# Altium PCB Gateway.PcbDoc
Units mil, origin at the board's own origin, x right, y up, seen from the top; angles counter-clockwise.
Board outline 3450 x 3705 mil, 2 copper layers (Top Layer, Bottom Layer); 7 components, 18 nets, 70 pads, 0 vias.
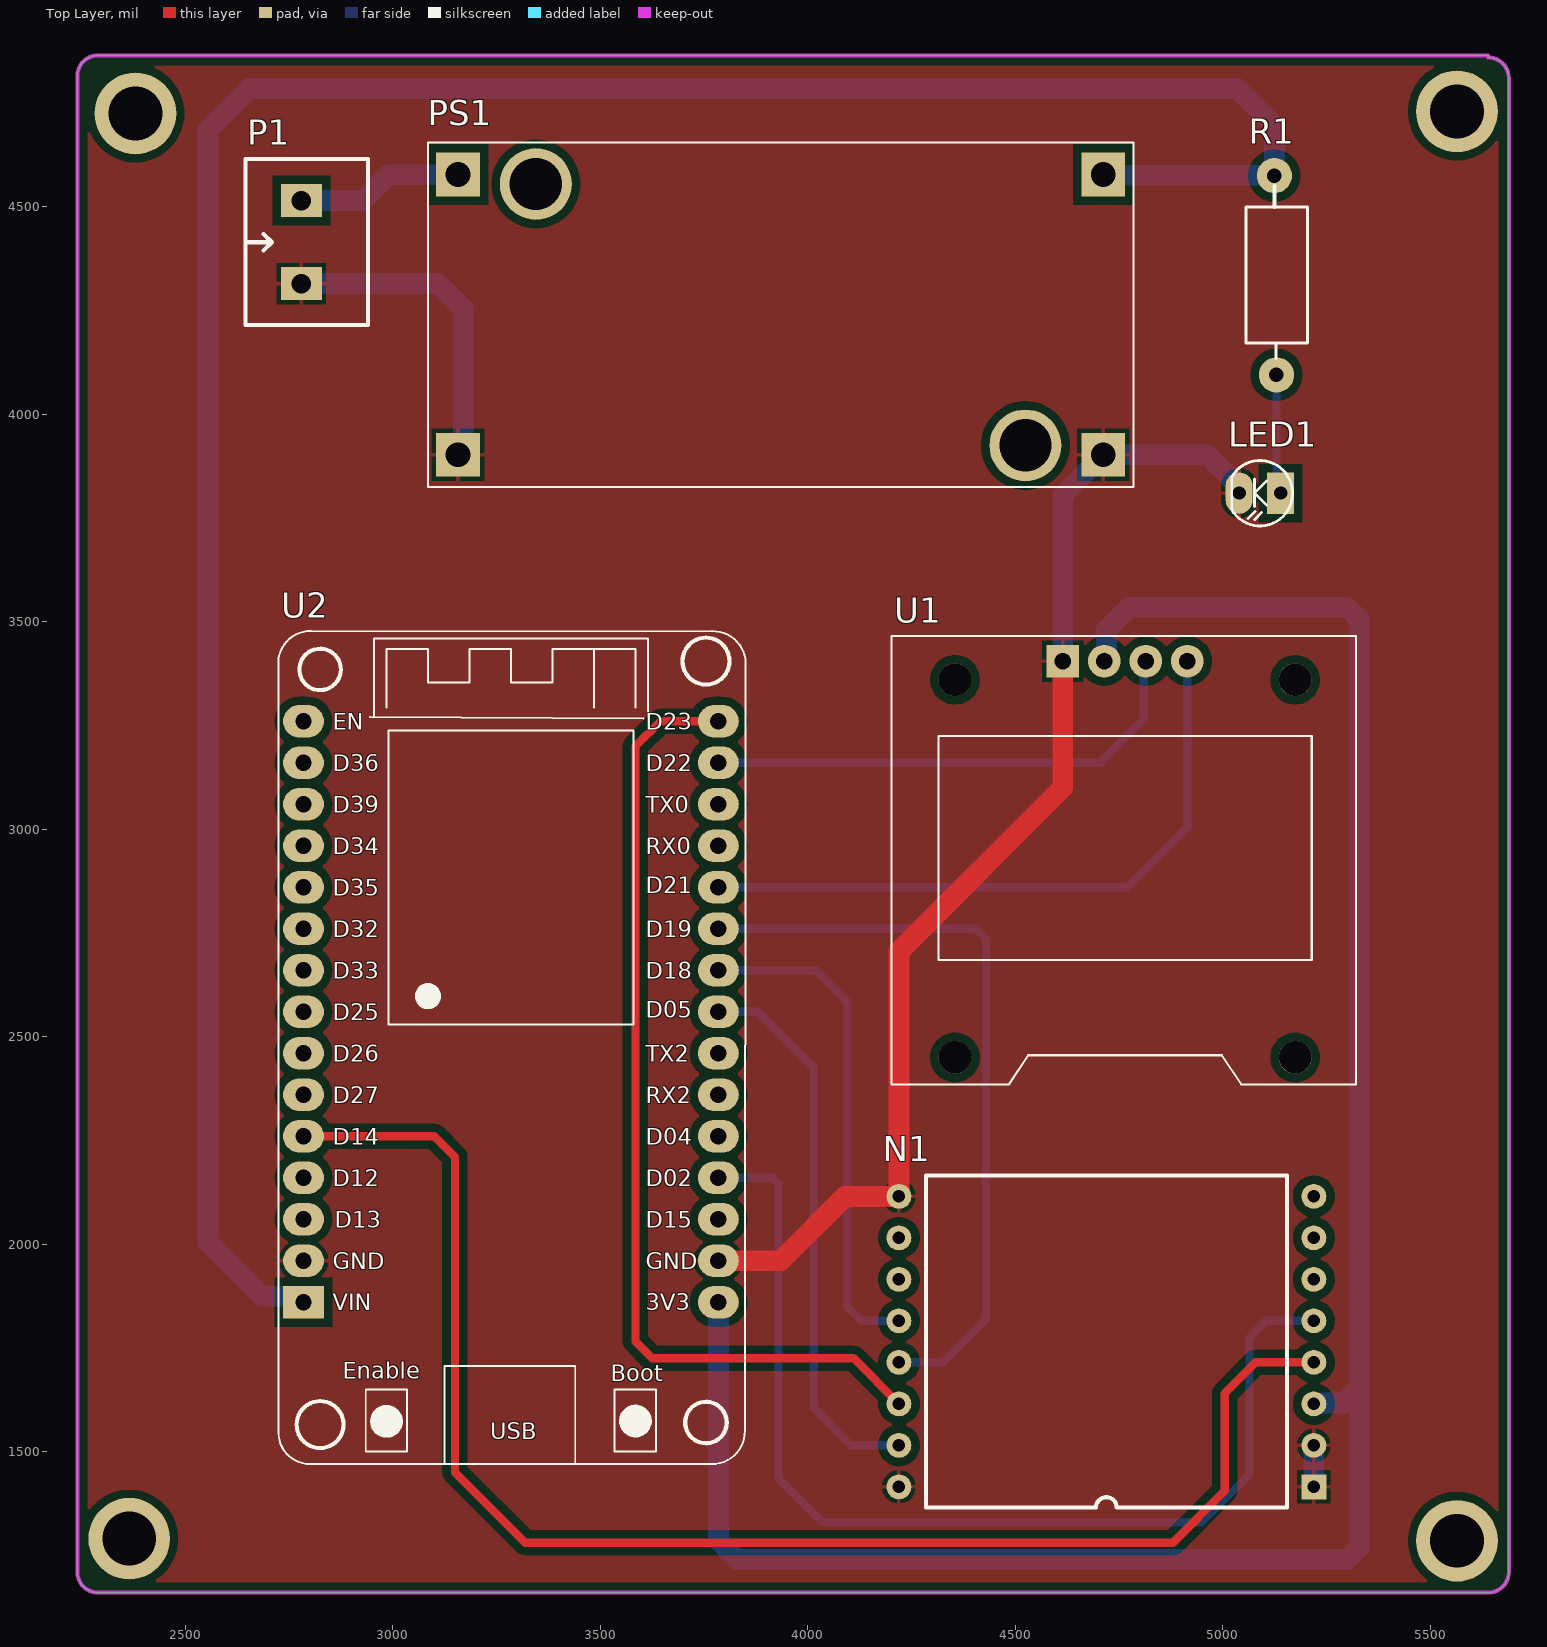
[diagram p0: Top Layer view]
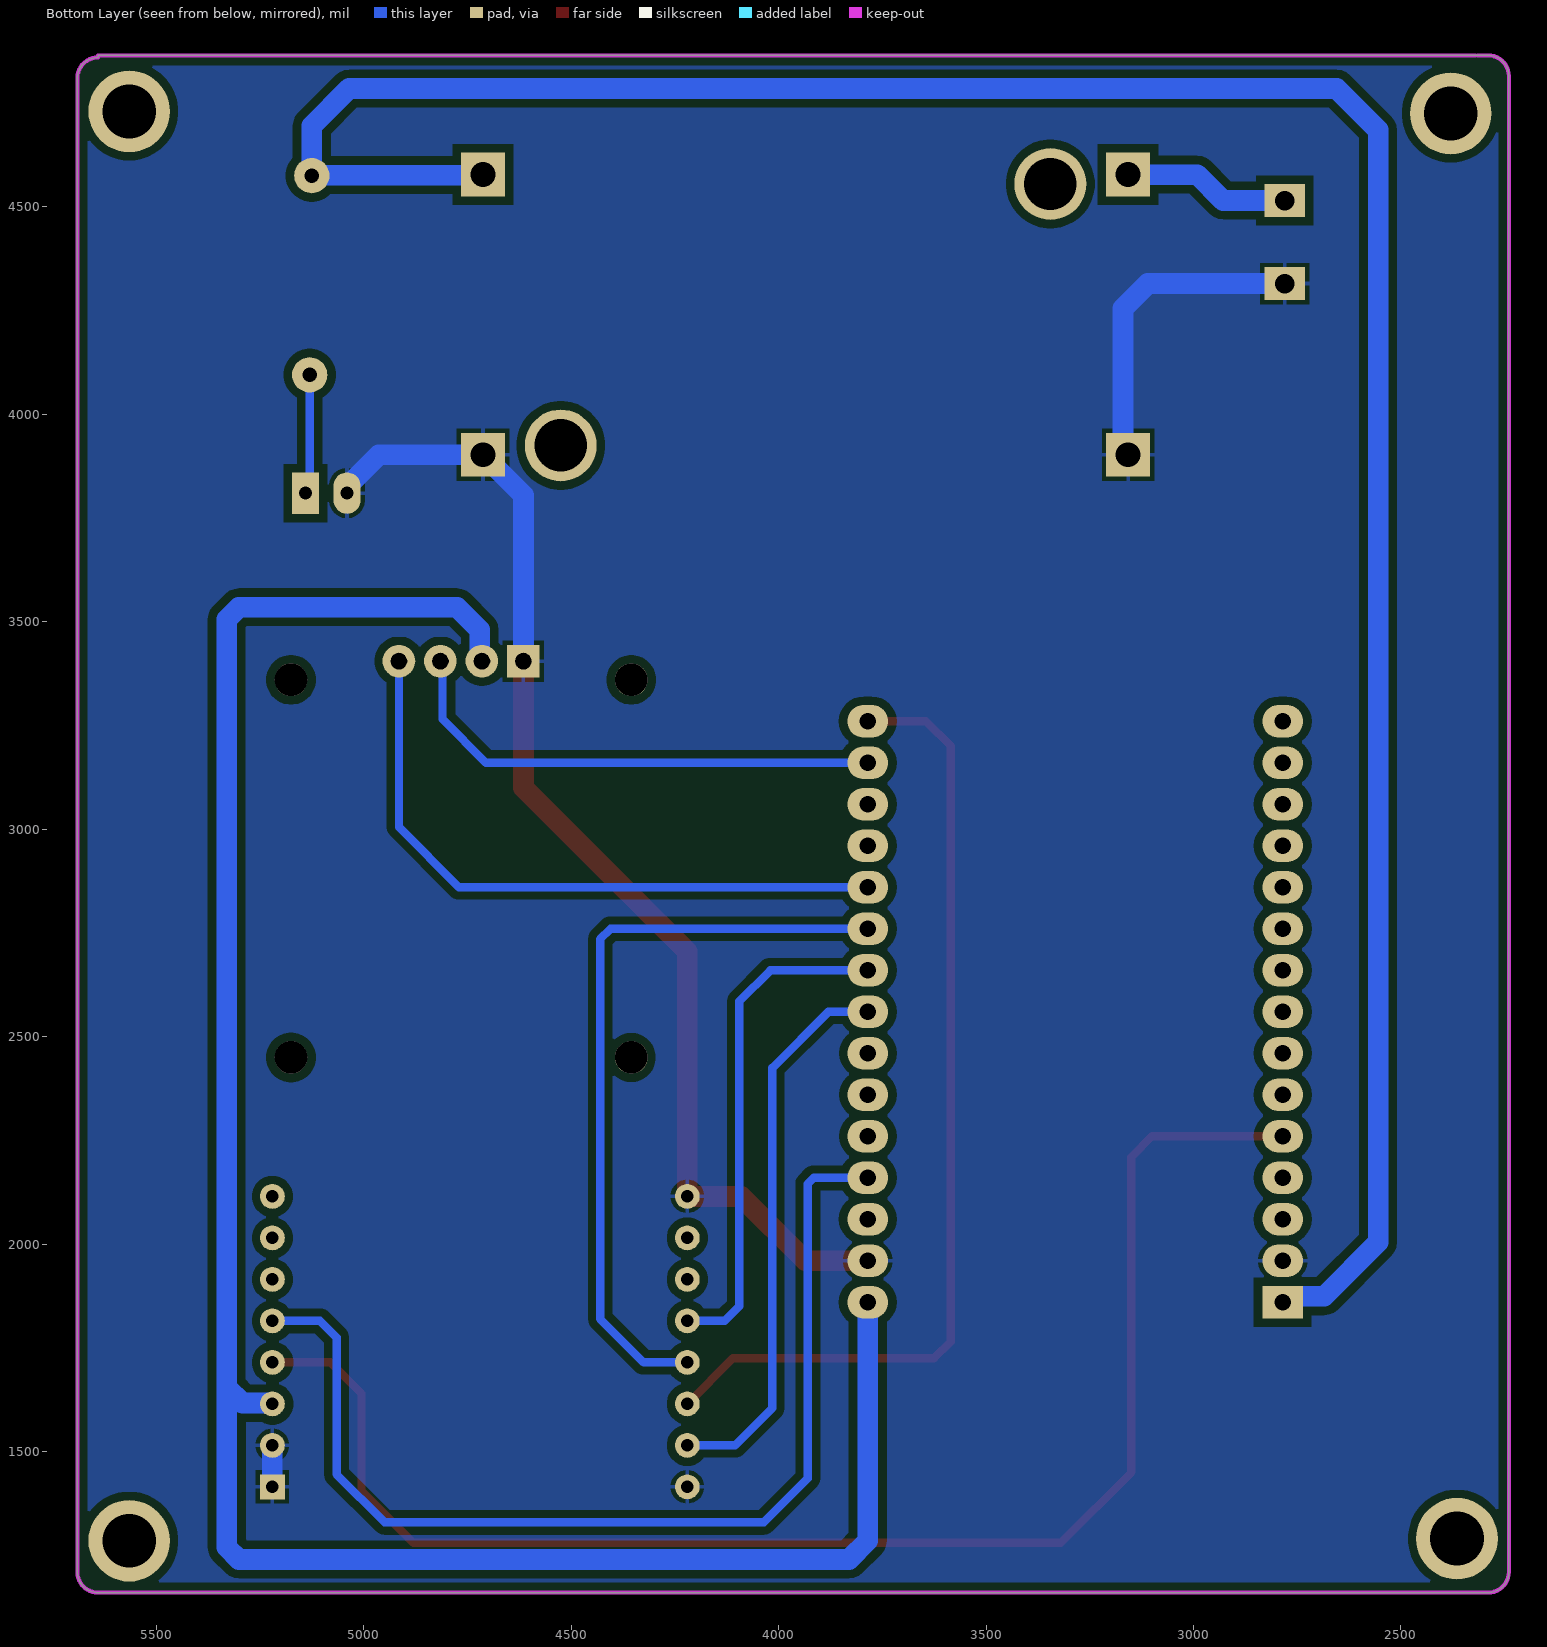
[diagram p1: Bottom Layer view, seen from below]
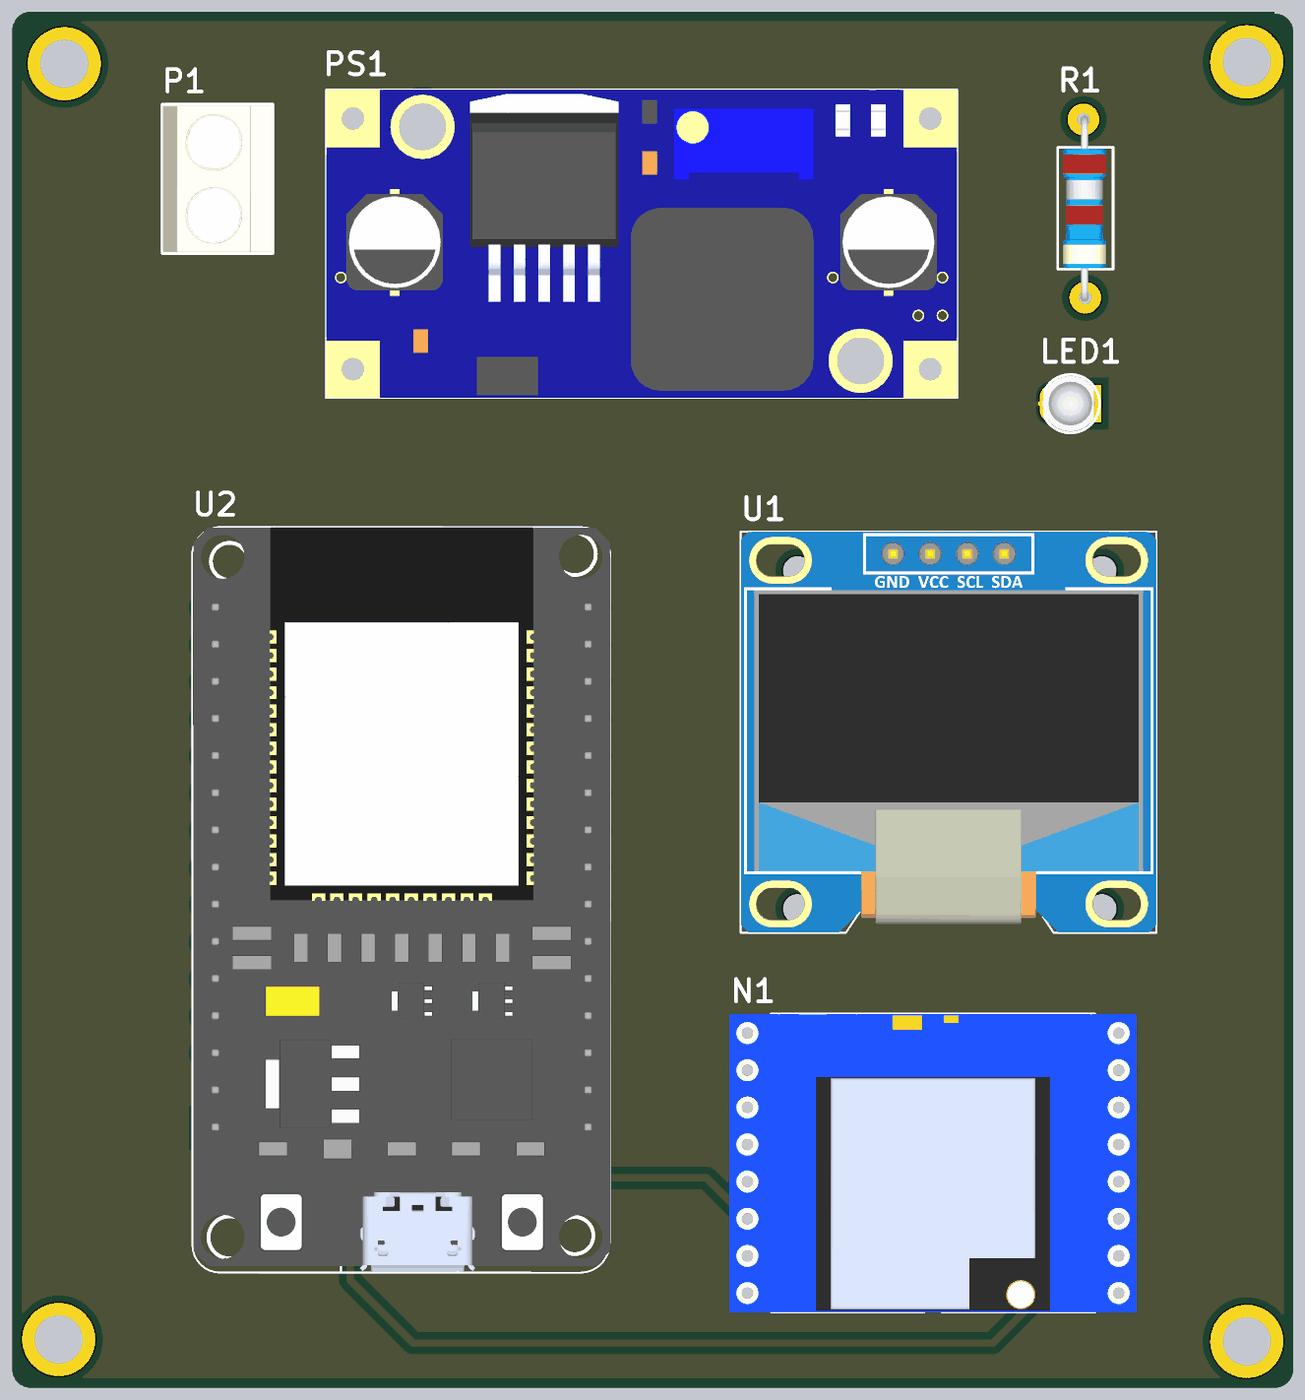
[diagram p2: 3D render of the assembled board from above, using the file's embedded part models]

## Layer stack, top to bottom
Top Solder: solder mask 0.4, Solder Resist, Dk 3.5
Top Layer: signal copper 1.4
Dielectric 1: dielectric 12.6, FR-4, Dk 4.8
Bottom Layer: signal copper 1.4
Bottom Solder: solder mask 0.4, Solder Resist, Dk 3.5

## Board outline
2240,1210 2240,4815 cw(c2290,4815) 2290,4865 5640,4865 5640,4860 cw(c5640,4810) 5690,4810 5690,1210 cw(c5640,1210) 5640,1160 2290,1160 cw(c2290,1210)

## Design rules (kind name [scope] priority, off if disabled: settings)
Clearance [All] p1: gap=20 ignorepadtopadclearanceinfootprint=FALSE
PolygonConnect [All] p1: connectstyle=Relief reliefconductorwidth=10 reliefentries=4 polygonreliefangle="90 Angle" airgapwidth=10
RoomDefinition Sheet1 [InComponentClass('Sheet1')] p1: confinementstyle=ConfineIn formatcopy=TRUE lockcomponents=FALSE outline 7045,1055 11960,1055 11960,3185 7045,3185
RoutingVias [All] p1: holewidth=28 width=50 viastyle="Through Hole" minholewidth=28 minwidth=50 maxholewidth=28 maxwidth=50
SolderMaskExpansion [All] p1: expansion=4 istentingtop=FALSE
Width [All] p1: maxlimit=50 minlimit=20 preferedwidth=20
30 further rules are at their usual default settings.

## Components (designator, comment, footprint, x,y, rotation, side; value= is the part's Value field where it differs from the comment)
LED1 "LED" LED-3 5140,3810 r180 top value="LED 3 ly Single Colour"
N1 "SX1278" DIP16 5220,1415 r180 top
P1 "Header 2 - M" "Medium - Header 2" 2780,4415 r90 top
PS1 "Module LM2596" CONV_MC00100 3935,4240 r0 top
R1 "510" RES-1/2W 5130,4355 r270 top
U1 "DISPLAY_OLED" DISPLAY_OLED 4765,2927.5 r0 top
U2 "ESP32_30" ESP32_30 3285,2560 r0 top

## Footprints (in the part's own frame and the unit in brackets; to place one, negate y for a bottom-side part, rotate by r counter-clockwise, add the part's x,y. Pads: shape width x height; smd on the part's side, far side on the other; paste and mask are expansions set on the pad)
CONV_MC00100 [mil]
  rect 105.63x105.63 / inner round 105.63 / far side rect 105.63x105.63 hole 60 mask+4.02: IN+(-777.5,337.5) IN-(-777.5,-337.5) OUT+(777.5,337.5) OUT-(777.5,-337.5)
  round 173.23 hole 125.98 mask+4.02: MH1(-590,315) MH2(590,-315)
  silkscreen extent -850,-415 850,415, body extent -850,-415 850,415, height 551
DIP16 [mil]
  rect 60x60 hole 30: 1(0,0)
  round 60 hole 30: 2(0,-100) 3(0,-200) 4(0,-300) 5(0,-400) 6(0,-500) 7(0,-600) 8(0,-700) 9(1000,-700) 10(1000,-600) 11(1000,-500) 12(1000,-400) 13(1000,-300) 14(1000,-200) 15(1000,-100) 16(1000,0)
  silkscreen extent 65,-750 935,50, body extent -49,-752 1049,52, height 177
DISPLAY_OLED [mm]
  rect 2x2 hole 1: 1(-3.81,12.128)
  round 2 hole 1: 2(-1.27,12.128) 3(1.27,12.128) 4(3.81,12.128)
  round 2 hole 2 unplated: ""(-10.414,-12.128) ""(-10.414,10.986) ""(10.414,-12.128) ""(10.414,10.986)
  silkscreen extent -14.3,-13.78 14.15,13.66, body extent -14.28,-13.76 14.12,13.64, height 5.7
ESP32_30 [mm] "Microcontoller Board 30 Pins Wifi 2.4GHz BLE 4.2 ESP32-WROOM-32D"
  oval 2.5x2 hole 1: 1(-12.7,17.78) 2(-12.7,15.24) 3(-12.7,12.7) 4(-12.7,10.16) 5(-12.7,7.62) 6(-12.7,5.08) 7(-12.7,2.54) 8(-12.7,0) 9(-12.7,-2.54) 10(-12.7,-5.08) 11(-12.7,-7.62) 12(-12.7,-10.16) 13(-12.7,-12.7) 14(-12.7,-15.24) 16(12.7,17.78) 17(12.7,15.24) 18(12.7,12.7) 19(12.7,10.16) 20(12.7,7.62) 21(12.7,5.08) 22(12.7,2.54) 23(12.7,0) 24(12.7,-2.54) 25(12.7,-5.08) 26(12.7,-7.62) 27(12.7,-10.16) 28(12.7,-12.7) 29(12.7,-15.24) 30(12.7,-17.78)
  rect 2.5x2 hole 1: 15(-12.7,-17.78)
  silkscreen extent -14.23,-27.69 14.35,23.31, body extent -14.15,-27.61 14.35,23.29, height 7
LED-3 [mil] "LED 2 PIN, 3ly Only colour"
  rect 65x100 hole 32: 1(0,0)
  oval 65x100 hole 32: 2(100,0)
  silkscreen extent -29,-78 118,79, body extent -13,-75 125,75, height 217
"Medium - Header 2" [mm]
  rect 2x2.5 hole 1.2: 1(-2.54,0) 2(2.54,0)
  silkscreen extent -5.08,-4.08 5.08,3.43, body extent -5,-4.07 5,3.43, height 10
RES-1/2W [mil]
  round 85 hole 35: 1(-220,-5) 2(260,0)
  silkscreen extent -195,-74 221,75, body extent -230,-60 270,56, height 121

## Part data
LED1: "LED Single colour Green and Red"
P1: "Header, 2-Pin, Medium", LatestRevisionDate=17-Jul-2002, LatestRevisionNote="Re-released for DXP Platform.", Publisher="Altium Limited"
PS1: library part MC00100, "DC-DC LM2596 Step Down Adjustable Converter Power Supply Module 1.3V-35V", Package=None, Check_prices=https://www.snapeda.com/parts/MC00100/YKS/view-part/?ref=eda, MF=YKS, MP=MC00100, SnapEDA_Link=https://www.snapeda.com/parts/MC00100/YKS/view-part/?ref=snap
R1: library part Res, "Res", Manufacturer="Generic Components", Class=Passive, Published=08/06/2000, Publisher="Altium Hobart Technology Centre", SubClass=R
U1: "Display Oled 128x64 0.96\" I2C."
U2: "Microcontoller Board 30 Pins Wifi 2.4GHz BLE 4.2 ESP32-WROOM-32D", ComponentLink1Description=Datasheet, ComponentLink1URL=https://www.mouser.com/datasheet/2/891/esp32_wroom_32d_esp32_wroom_32u_datasheet_en-1365844.pdf

## Free pads (board coordinates)
  round 196.85 hole 129.92: 2(2380,4725) 3(5565,4730) 4(5565,1285) 5(2365,1290)

## Nets (pads, with @x,y where several pads share a name; then routed paths per layer and width w, separated by ;. In a path a pad name is that pad's centre, name@x,y a point inside that pad or via, vN(x,y) a via of type N, cw(c..) or ccw(c..) an arc to the next point about the centre after c; other vN are vias at no path point)
3.3V: N1.3 U1.2 U2.30 | length 5235.7
  Bottom Layer w50: U2.30 3785,1285 3830,1240 5300.71,1240 5330,1269.29 5330,1655 ; U1.2 4720.5,3410.5 4720.5,3480.5 4775,3535 5300.71,3535 5330,3505.71 5330,1655 ; N1.3 5221.91,1616.91 5291.91,1616.91 5330,1655
+5: PS1.OUT+ R1.1 U2.15 | length 6152.7
  Bottom Layer w50: U2.15 2770.63,1874.37 2684.92,1874.37 2555,2004.29 2555,4685 2655,4785 5035,4785 5125,4695 R1.1 5123.75,4576.25 4713.75,4576.25 PS1.OUT+
+12: P1.2 PS1.IN+ | length 403.4
  Bottom Layer w50: P1.2 2928.51,4515 2991.01,4577.5 PS1.IN+
\: LED1.2 N1.1 N1.2 N1.9 N1.16 P1.1 PS1.IN- PS1.OUT- U1.1 U2.14 U2.29 | length 3738.1
  Top Layer w50: U2.29 3935.21,1960 4090.21,2115 N1.9 4220,2705 4615,3100 U1.1
  Bottom Layer w50: P1.1 3110,4315 3170,4255 3170,3915 PS1.IN- ; U1.1 4615,3805 PS1.OUT- 4962.97,3902.5 5040,3825.47 LED1.2 ; N1.1 N1.2
DIO0: N1.5 U2.27 | length 2588.9
  Bottom Layer w20: U2.27 3915,2160 3930,2145 3930,1435 4035,1330 4950,1330 5065,1445 5065,1775 5105,1815 N1.5
DIO1: N1.6
DIO2: N1.7
DIO3: N1.8
DIO4: N1.10
DIO5: N1.11
MISO: N1.13 U2.21 | length 1823.8
  Bottom Layer w20: U2.21 4405,2760 4430,2735 4430,1820 4325,1715 N1.13
MOSI: N1.14 U2.16 | length 2357
  Top Layer w20: U2.16 3645,3260 3585,3200 3585,1765 3625,1725 4110,1725 N1.14
NetLED1_1: LED1.1 R1.2 | length 289.1
  Bottom Layer w20: R1.2 5130,3820 LED1.1
NSS: N1.15 U2.23 | length 1348.2
  Bottom Layer w20: U2.23 3880,2560 4015,2425 4015,1605 4105,1515 N1.15
RST: N1.4 U2.11 | length 3604
  Top Layer w20: U2.11 3100,2260 3150,2210 3150,1450 3320,1280 4880,1280 5005,1405 5005,1640 5080,1715 N1.4
SCK: N1.12 U2.22 | length 1215.6
  Bottom Layer w20: U2.22 4020,2660 4095,2585 4095,1850 4130,1815 N1.12
SCL: U1.3 U2.17 | length 1210.6
  Bottom Layer w20: U2.17 4705,3160 4810,3265 4810,3400 U1.3
SDA: U1.4 U2.20 | length 1590.1
  Bottom Layer w20: U2.20 4770,2860 4915,3005 U1.4
pads on no net: PS1.MH1 PS1.MH2 U1. U2.1 U2.2 U2.3 U2.4 U2.5 U2.6 U2.7 U2.8 U2.9 U2.10 U2.12 U2.13 U2.18 U2.19 U2.24 U2.25 U2.26 U2.28

## Polygon pours and split planes (outlines as drawn)
\ on Bottom Layer "\_L02_P000" (solid, remove dead copper, pour order 0): 2240,4840 2240,1190 2275,1155 5655,1155 5655,1160 5695,1200 5695,4825 5660,4860 2285,4860 2260,4860
\ on Top Layer "\_L01_P001" (solid, remove dead copper, pour order 1): 2265,4870 2265,4850 2230,4815 2230,1210 2275,1165 5660,1165 5700,1205 5700,4820 5685,4820 5640,4865 2245,4865

## Keep-outs
Keep-Out Layer:
  lines w10: 2315,4865 2290,4865 ccw(c2290,4815) 2240,4815 2240,1210 ccw(c2290,1210) 2290,1160 5640,1160 ccw(c5640,1210) 5690,1210 5690,4810 ccw(c5640,4810) 5640,4860 ; 2320,4865 5640,4865

## Text inside footprints (layer, text, board x,y; h text height)
PS1: Mechanical 13 "OUT+" at 4584.61,4456.54 h50; Mechanical 13 "OUT-" at 4604.29,3974.25 h50; Mechanical 13 "IN-" at 3108.23,3974.25 h50; Mechanical 13 "IN+" at 3108.23,4456.54 h50
U2: Top Overlay "RX0" at 3610,2940 h39.37; Top Overlay "TX0" at 3610,3040 h39.37; Top Overlay "D22" at 3610,3140 h39.37; Top Overlay "D21" at 3610,2845 h39.37; Top Overlay "D18" at 3610,2640 h39.37; Top Overlay "D05" at 3610,2545 h39.37; Top Overlay "D19" at 3610,2740 h39.37; Top Overlay "D25" at 2855,2540 h39.37; Top Overlay "D33" at 2855,2640 h39.37; Top Overlay "D35" at 2855,2840 h39.37; Top Overlay "D34" at 2855,2940 h39.37; Top Overlay "D32" at 2855,2740 h39.37; Top Overlay "D26" at 2855,2440 h39.37; Top Overlay "D13" at 2860,2040 h39.37; Top Overlay "D27" at 2855,2340 h39.37; Top Overlay "D14" at 2855,2240 h39.37; Top Overlay "GND" at 2855,1940 h39.37; Top Overlay "VIN" at 2855,1840 h39.37; Top Overlay "D12" at 2855,2140 h39.37; Top Overlay "D39" at 2855,3040 h39.37; Top Overlay "3V3" at 3610,1840 h39.37; Top Overlay "D04" at 3610,2240 h39.37; Top Overlay "GND" at 3610,1940 h39.37; Top Overlay "D02" at 3610,2140 h39.37; Top Overlay "D15" at 3610,2040 h39.37; Top Overlay "RX2" at 3610,2340 h39.37; Top Overlay "TX2" at 3610,2440 h39.37; Top Overlay "D36" at 2855,3140 h39.37; Top Overlay "D23" at 3610,3240 h39.37; Top Overlay "EN" at 2855,3240 h39.37; Top Overlay "USB" at 3235,1530 h39.37; Top Overlay "Boot" at 3525,1670 h39.37; Top Overlay "Enable" at 2880,1675 h39.37